# Altium PCB Time4CM4_Riser.PcbDoc (part 1 of 2)
Units mil, origin at the board's own origin, x right, y up, seen from the top; angles counter-clockwise.
Board outline 2171.6 x 1574.73 mil, 2 copper layers (Top Layer, Bottom Layer), stack 61.756 mil thick; 2 components, 138 nets, 412 pads, 162 vias.
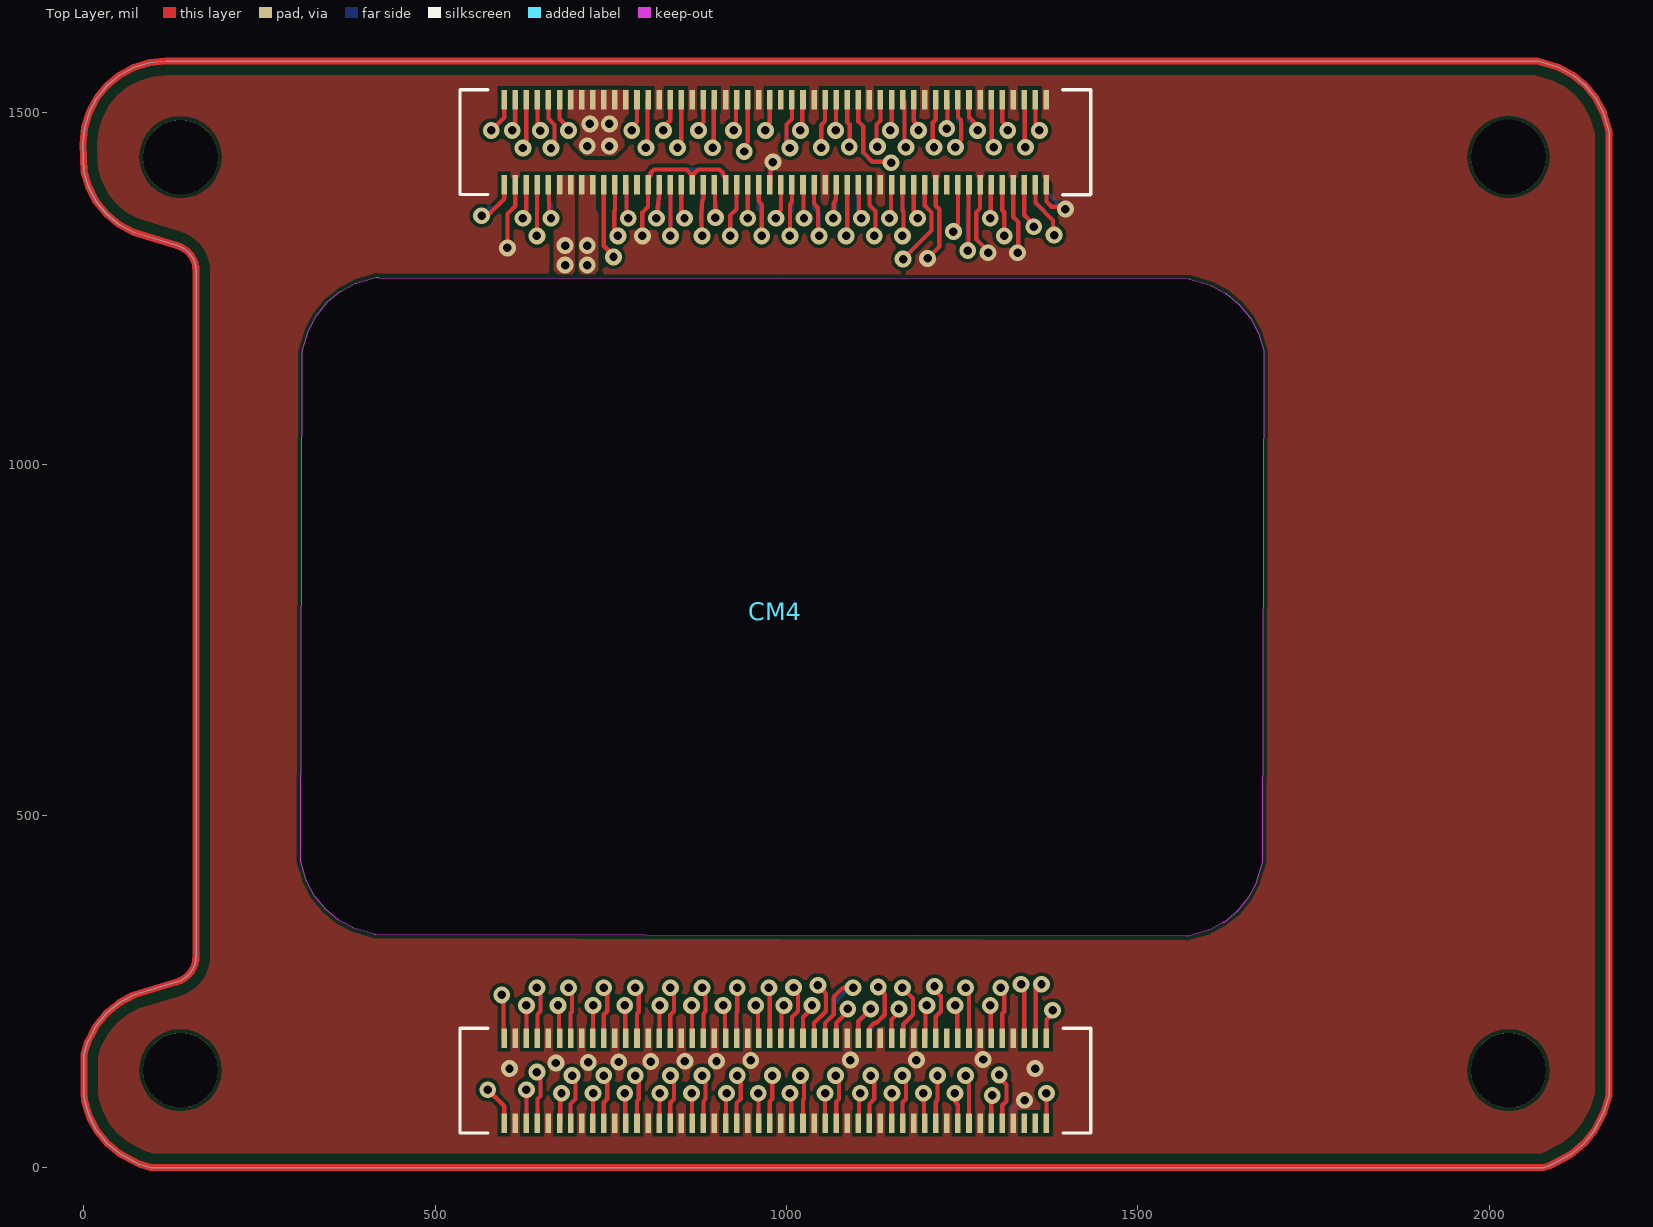
[diagram p0: Top Layer view]
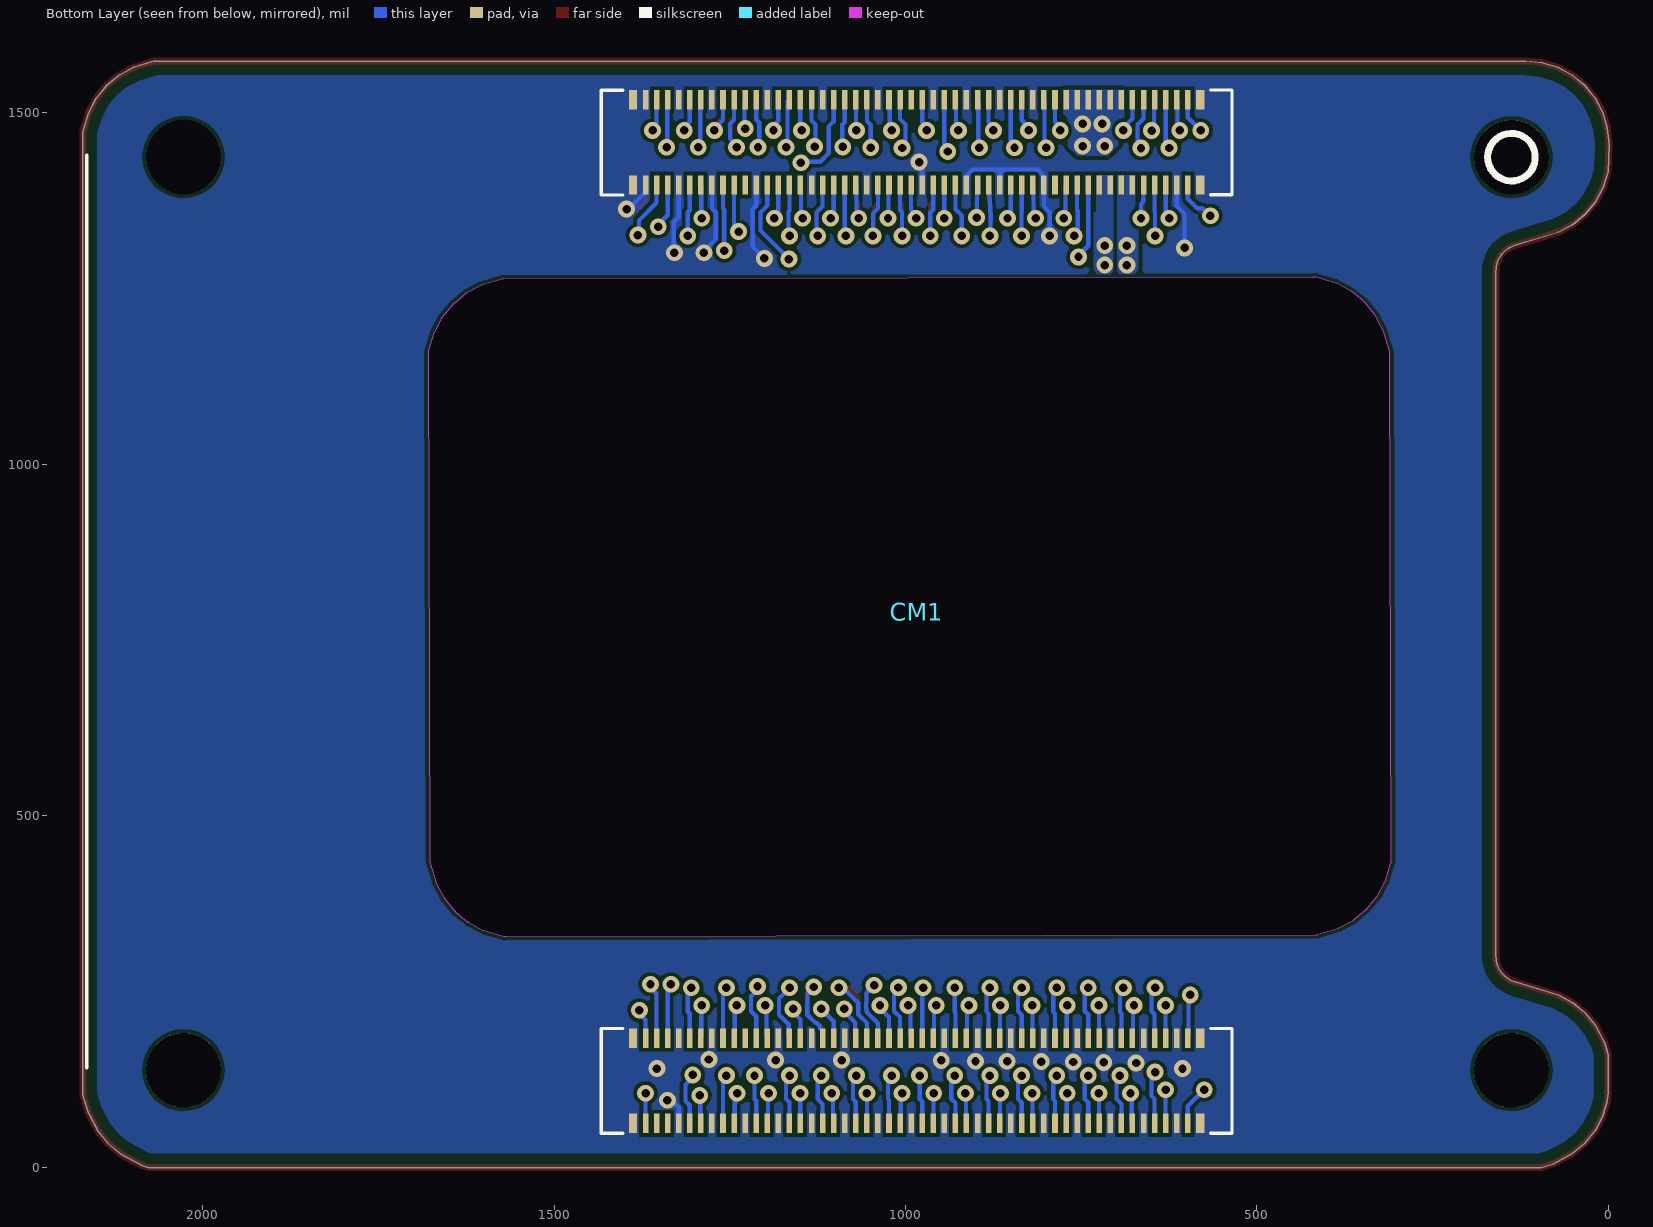
[diagram p1: Bottom Layer view, seen from below]

## Layer stack, top to bottom
Top Solder: solder mask 1, SM-001, Dk 4
Top Layer: signal copper 1.378
Dielectric 1: core 59, Core-043, Dk 4.3
Bottom Layer: signal copper 1.378
Bottom Solder: solder mask 1, SM-001, Dk 4

## Board outline
33.59,33.59 51.49,18.9 79.04,4.18 95.6,-0.85 2077.21,-0.85 2085.95,1.8 2116.43,18.1 2134.33,32.79 2149.02,50.68 2162.48,75.88 ccw(c2153.66,80.59) 2163.23,77.69 2170,100 ccw(c2160.6,103.41) 2170.6,103.41 2170.6,1472.34 ccw(c2160.6,1472.34) 2170.17,1475.24 2162.39,1500.89 2151.47,1521.31 2136.78,1539.21 2118.89,1553.9 2098.47,1564.81 2068.57,1573.88 2068.57,1573.8 117.11,1573.8 94.07,1571.53 71.91,1564.81 51.49,1553.9 33.59,1539.21 18.91,1521.31 7.99,1500.89 1.27,1478.73 -1,1455.69 0.46,1416.15 7.18,1393.99 18.1,1373.57 32.79,1355.67 50.68,1340.98 70.24,1330.53 72.05,1329.78 132.9,1311.32 cw(c121.82,1274.78) 160,1274.78 160,300.02 cw(c121.82,300.02) 132.9,263.48 72.05,245.02 70.24,244.27 50.68,233.82 32.79,219.13 18.1,201.23 6.12,178.83 ccw(c14.94,174.12) 5.37,177.02 0.91,162.29 ccw(c10.46,159.35) 0.46,159.39 0.46,105.92 1.27,94.07 7.99,71.91 18.91,51.49
cut-out: 316.79,408.15 313.2,419.98 cw(c544.4,490.56) 313.2,420 313.2,419.98 cw(c317.13,421.18) 313.19,420.03 cw(c327.37,424.19) 313.18,420.07 309.32,432.79 cw(c317.89,435.39) 309.3,432.85 cw(c309.59,432.94) 309.3,432.86 cw(c309.58,432.95) 309.29,432.87 cw(c317.29,435.39) 309.27,432.96 cw(c329.13,438.88) 309.25,433.02 cw(c323.65,437.25) 308.64,437.25 cw(c311.88,437.26) 308.64,437.27 308.64,437.3 311.01,1159.14 cw(c316.02,1159.12) 311.22,1160.58 320.29,1190.47 cw(c325.08,1189.02) 320.68,1191.39 331.58,1211.79 cw(c335.99,1209.44) 332.13,1212.62 332.14,1212.63 346.81,1230.51 cw(c349.99,1227.92) 346.83,1230.52 cw(c350.68,1227.35) 347.51,1231.21 347.52,1231.22 365.4,1245.89 cw(c366.54,1244.51) 365.42,1245.91 cw(c368.59,1242.02) 366.23,1246.44 386.64,1257.36 cw(c389.02,1252.91) 387.55,1257.73 cw(c387.59,1257.64) 387.57,1257.74 413.2,1265.51 cw(c413.24,1265.43) 413.22,1265.52 413.2,1265.51 cw(c417.57,1251.12) 417.57,1266.16 cw(c417.57,1261.15) 419.62,1265.73 1572.52,1263.79 cw(c1572.51,1258.79) 1573.96,1263.58 1603.86,1254.51 cw(c1602.41,1249.74) 1604.78,1254.13 1625.17,1243.22 cw(c1622.84,1238.83) 1626,1242.67 1626,1242.68 cw(c1625.85,1242.48) 1626.01,1242.67 1643.89,1227.99 cw(c1643.74,1227.79) 1643.91,1227.98 1643.9,1227.98 cw(c1640.75,1224.14) 1644.59,1227.3 cw(c1644.39,1227.12) 1644.6,1227.28 1659.28,1209.4 1659.29,1209.38 ccw(c1659.09,1209.23) 1659.28,1209.4 1659.28,1209.39 cw(c1655.42,1206.22) 1659.83,1208.58 cw(c1659.83,1208.57) 1659.83,1208.57 ccw(c1655.41,1206.21) 1659.29,1209.38 1659.83,1208.58 1659.83,1208.57 1670.74,1188.16 cw(c1670.74,1188.15) 1670.75,1188.15 cw(c1666.35,1185.8) 1671.12,1187.24 1678.9,1161.6 cw(c1664.51,1157.23) 1679.55,1157.23 cw(c1679.45,1157.23) 1679.55,1157.22 1677.18,435.35 ccw(c1676.97,435.36) 1677.18,435.37 1677.18,435.35 cw(c1672.18,435.36) 1676.96,433.91 1667.89,404.02 cw(c1663.13,405.46) 1667.51,403.1 1656.61,382.7 cw(c1652.2,385.04) 1656.06,381.87 1656.06,381.88 cw(c1655.63,382.22) 1656.05,381.86 1641.38,363.98 cw(c1640.94,364.32) 1641.36,363.96 1641.37,363.97 cw(c1637.5,367.15) 1640.68,363.28 1640.67,363.27 ccw(c1640.03,364.06) 1640.68,363.28 1640.67,363.28 ccw(c1637.51,367.14) 1641.36,363.96 1640.67,363.27 1622.78,348.6 cw(c1619.52,352.56) 1622.77,348.58 1622.78,348.59 cw(c1619.6,352.46) 1621.96,348.05 ccw(c1619.61,352.44) 1622.77,348.58 1621.96,348.05 cw(c1621.92,348.11) 1621.95,348.04 1601.54,337.13 1601.53,337.12 ccw(c1601.46,337.28) 1601.54,337.13 cw(c1599.17,341.57) 1600.57,336.73 1571.8,328.43 ccw(c1570.29,333.54) 1571.84,328.44 cw(c1571.04,331.03) 1571.79,328.43 1571.8,328.43 cw(c1569.92,334.78) 1569.92,328.16 cw(c1569.92,333.17) 1569.08,328.23 415.67,330.69 cw(c415.68,335.71) 414.23,330.91 384.33,339.98 cw(c385.78,344.77) 383.41,340.36 363.01,351.26 cw(c365.37,355.69) 362.19,351.82 362.19,351.81 cw(c377.89,370.99) 362.18,351.82 344.3,366.5 344.28,366.51 cw(c347.47,370.38) 343.59,367.2 343.59,367.21 329.56,384.29 329.56,384.3 329.53,384.34 cw(c333.37,387.54) 329.5,384.37 cw(c341.13,393.86) 327.95,386.69 cw(c343.56,395.14) 327.93,386.72 317.89,405.5 cw(c417.02,458.02) 317.88,405.52 cw(c331.16,412.55) 316.79,408.14 cw(c316.87,408.17)
cut-out: 317.44,406.33 cw(c321.9,408.71) 317.07,407.24 ccw(c321.92,408.72)
cut-out: 317.44,406.33 cw(c321.9,408.71) 317.07,407.24 ccw(c321.92,408.72)

## Design rules (kind name [scope] priority, off if disabled: settings)
BoardOutlineClearance BoardOutlineClearance_Polygon [IsPolygon] p1: gap=20 ignorepadtopadclearanceinfootprint=FALSE
Clearance [All] p1: gap=5 ignorepadtopadclearanceinfootprint=FALSE
DiffPairsRouting [All] p1: maxlimit=10 minlimit=10 mostfreqgap=10 toplayer_minwidth=6 toplayer_maxwidth=6 toplayer_prefwidth=6 bottomlayer_minwidth=6 bottomlayer_maxwidth=6 bottomlayer_prefwidth=6 maxuncoupledlength=500
HoleSize [All] p1: absolutevalues=TRUE maxlimit=120 minlimit=6 maxpercent=80.000 minpercent=20.000
PlaneClearance [All] p1: clearance=8
PlaneConnect [All] p1: planeconnectstyle=Direct reliefexpansion=20 reliefentries=4 reliefconductorwidth=10 reliefairgap=10
PolygonConnect [All] p1: connectstyle=Direct reliefconductorwidth=10 reliefentries=4 polygonreliefangle="90 Angle" airgapwidth=10
RoutingVias [All] p1: holewidth=6 width=20 viastyle="Through Hole" minholewidth=6 minwidth=10 maxholewidth=50 maxwidth=100
SolderMaskExpansion [All] p1: expansion=4 istentingtop=FALSE
Width [All] p1: maxlimit=150 minlimit=6 preferedwidth=10
26 further rules are at their usual default settings.

## Classes and differential pairs
net class CM4_IO_Conn_Nets: 1V8 3V3 5V ANAIP_0 ANAIP_1 BT_DIS CM0_C_N CM0_C_P CM0_D0_N CM0_D0_P CM0_D1_N CM0_D1_P CM1_C_N CM1_C_P CM1_D0_N CM1_D0_P CM1_D1_N CM1_D1_P CM1_D2_N CM1_D2_P CM1_D3_N CM1_D3_P CM_GPIOx DSI0_C_N DSI0_C_P DSI0_D0_N DSI0_D0_P DSI0_D1_N DSI0_D1_P DSI1_C_N DSI1_C_P DSI1_D0_N DSI1_D0_P DSI1_D1_N DSI1_D1_P DSI1_D2_N DSI1_D2_P DSI1_D3_N DSI1_D3_P ETH_LED1 ETH_LED2 ETH_LED3 ETH_PAIR0_N ETH_PAIR0_P ETH_PAIR1_N ETH_PAIR1_P ETH_PAIR2_N ETH_PAIR2_P ETH_PAIR3_N ETH_PAIR3_P ETH_SYNC_IN ETH_SYNC_OUT GLOBAL_EN GND GPIO_0 GPIO_1 GPIO_2 GPIO_3 GPIO_4 GPIO_5 GPIO_6 GPIO_7 GPIO_8 GPIO_9 GPIO_10 GPIO_11 GPIO_12 GPIO_13 GPIO_16 GPIO_17 GPIO_19 GPIO_20 GPIO_21 GPIO_22 GPIO_23 GPIO_24 GPIO_25 GPIO_26 GPIO_27 GPIO_44 GPIO_45 GPIO_VREF HDMI0_CEC HDMI0_CLK_N HDMI0_CLK_P HDMI0_HP HDMI0_SCL HDMI0_SDA HDMI0_TX0_N HDMI0_TX0_P HDMI0_TX1_N HDMI0_TX1_P HDMI0_TX2_N HDMI0_TX2_P HDMI1_CEC HDMI1_CLK_N HDMI1_CLK_P HDMI1_HP HDMI1_SCL HDMI1_SDA HDMI1_TX0_N HDMI1_TX0_P HDMI1_TX1_N HDMI1_TX1_P HDMI1_TX2_N HDMI1_TX2_P LED_ACT LED_PWR NetCM1_20 NetCM1_49 NetCM1_51 NetCM1_55 NetCM1_76 NetCM1_104 NetCM1_106 NetCM1_119 nEXTRST nRPIBOOT PCIe_CLK_N PCIe_CLK_nREQ PCIe_CLK_P PCIe_nRST PCIe_RX_N PCIe_RX_P PCIe_TX_N PCIe_TX_P RUN_PG SD_CLK SD_CMD SD_DAT0 SD_DAT1 SD_DAT2 SD_DAT3 SD_DAT4 SD_DAT5 SD_DAT6 SD_DAT7 SD_PWR_ON SD_VDD_OR USB_N USB_OTG USB_P VDAC_COMP WL_DIS
net class CM4_Conn_Nets: 1V8 3V3 5V ANAIP_0 ANAIP_1 BT_DIS CM0_C_N CM0_C_P CM0_D0_N CM0_D0_P CM0_D1_N CM0_D1_P CM1_C_N CM1_C_P CM1_D0_N CM1_D0_P CM1_D1_N CM1_D1_P CM1_D2_N CM1_D2_P CM1_D3_N CM1_D3_P CM_GPIOx DSI0_C_N DSI0_C_P DSI0_D0_N DSI0_D0_P DSI0_D1_N DSI0_D1_P DSI1_C_N DSI1_C_P DSI1_D0_N DSI1_D0_P DSI1_D1_N DSI1_D1_P DSI1_D2_N DSI1_D2_P DSI1_D3_N DSI1_D3_P ETH_LED1 ETH_LED2 ETH_LED3 ETH_PAIR0_N ETH_PAIR0_P ETH_PAIR1_N ETH_PAIR1_P ETH_PAIR2_N ETH_PAIR2_P ETH_PAIR3_N ETH_PAIR3_P ETH_SYNC_IN ETH_SYNC_OUT GLOBAL_EN GND GPIO_0 GPIO_1 GPIO_2 GPIO_3 GPIO_4 GPIO_5 GPIO_6 GPIO_7 GPIO_8 GPIO_9 GPIO_10 GPIO_11 GPIO_12 GPIO_13 GPIO_16 GPIO_17 GPIO_19 GPIO_20 GPIO_21 GPIO_22 GPIO_23 GPIO_24 GPIO_25 GPIO_26 GPIO_27 GPIO_44 GPIO_45 GPIO_VREF HDMI0_CEC HDMI0_CLK_N HDMI0_CLK_P HDMI0_HP HDMI0_SCL HDMI0_SDA HDMI0_TX0_N HDMI0_TX0_P HDMI0_TX1_N HDMI0_TX1_P HDMI0_TX2_N HDMI0_TX2_P HDMI1_CEC HDMI1_CLK_N HDMI1_CLK_P HDMI1_HP HDMI1_SCL HDMI1_SDA HDMI1_TX0_N HDMI1_TX0_P HDMI1_TX1_N HDMI1_TX1_P HDMI1_TX2_N HDMI1_TX2_P LED_ACT LED_PWR NetCM1_51 NetCM1_55 NetCM4_20 NetCM4_49 NetCM4_76 NetCM4_104 NetCM4_106 NetCM4_119 nEXTRST nRPIBOOT PCIe_CLK_N PCIe_CLK_nREQ PCIe_CLK_P PCIe_nRST PCIe_RX_N PCIe_RX_P PCIe_TX_N PCIe_TX_P RUN_PG SD_CLK SD_CMD SD_DAT0 SD_DAT1 SD_DAT2 SD_DAT3 SD_DAT4 SD_DAT5 SD_DAT6 SD_DAT7 SD_PWR_ON SD_VDD_OR USB_N USB_OTG USB_P VDAC_COMP WL_DIS
component class CM4_IO_Conn: CM1
component class CM4_Conn: CM4

## Components (designator, comment, footprint, x,y, rotation, side; value= is the part's Value field where it differs from the comment)
CM1 "Raspberry Pi Compute Module 4" CM4-F40C-100DS-0.4v_1.5mm_0mm#1 1082.68,790.35 r90 bottom locked
CM4 "Raspberry Pi Compute Module 4" CM4-F40C-100DS-0.4v_1.5mm_0mm#2 1082.68,790.55 r90 top locked

## Footprints (in the part's own frame and the unit in brackets; to place one, negate y for a bottom-side part, rotate by r counter-clockwise, add the part's x,y. Pads: shape width x height; smd on the part's side, far side on the other; paste and mask are expansions set on the pad)
CM4-F40C-100DS-0.4v_1.5mm_0mm#1 [mm] "DF40C-100DS-0.4v by Amornthep Phunsin"
  rect 0.7x0.2 smd: 1(18.5,7.3) 2(15.42,7.3) 3(18.5,6.9) 4(15.42,6.9) 5(18.5,6.5) 6(15.42,6.5) 7(18.5,6.1) 8(15.42,6.1) 9(18.5,5.7) 10(15.42,5.7) 11(18.5,5.3) 12(15.42,5.3) 13(18.5,4.9) 14(15.42,4.9) 15(18.5,4.5) 16(15.42,4.5) 17(18.5,4.1) 18(15.42,4.1) 19(18.5,3.7) 20(15.42,3.7) 21(18.5,3.3) 22(15.42,3.3) 23(18.5,2.9) 24(15.42,2.9) 25(18.5,2.5) 26(15.42,2.5) 27(18.5,2.1) 28(15.42,2.1) 29(18.5,1.7) 30(15.42,1.7) 31(18.5,1.3) 32(15.42,1.3) 33(18.5,0.9) 34(15.42,0.9) 35(18.5,0.5) 36(15.42,0.5) 37(18.5,0.1) 38(15.42,0.1) 39(18.5,-0.3) 40(15.42,-0.3) 41(18.5,-0.7) 42(15.42,-0.7) 43(18.5,-1.1) 44(15.42,-1.1) 45(18.5,-1.5) 46(15.42,-1.5) 47(18.5,-1.9) 48(15.42,-1.9) 49(18.5,-2.3) 50(15.42,-2.3) 51(18.5,-2.7) 52(15.42,-2.7) 53(18.5,-3.1) 54(15.42,-3.1) 55(18.5,-3.5) 56(15.42,-3.5) 57(18.5,-3.9) 58(15.42,-3.9) 59(18.5,-4.3) 60(15.42,-4.3) 61(18.5,-4.7) 62(15.42,-4.7) 63(18.5,-5.1) 64(15.42,-5.1) 65(18.5,-5.5) 66(15.42,-5.5) 67(18.5,-5.9) 68(15.42,-5.9) 69(18.5,-6.3) 70(15.42,-6.3) 71(18.5,-6.7) 72(15.42,-6.7) 73(18.5,-7.1) 74(15.42,-7.1) 75(18.5,-7.5) 76(15.42,-7.5) 77(18.5,-7.9) 78(15.42,-7.9) 79(18.5,-8.3) 80(15.42,-8.3) 81(18.5,-8.7) 82(15.42,-8.7) 83(18.5,-9.1) 84(15.42,-9.1) 85(18.5,-9.5) 86(15.42,-9.5) 87(18.5,-9.9) 88(15.42,-9.9) 89(18.5,-10.3) 90(15.42,-10.3) 91(18.5,-10.7) 92(15.42,-10.7) 93(18.5,-11.1) 94(15.42,-11.1) 95(18.5,-11.5) 96(15.42,-11.5) 97(18.5,-11.9) 98(15.42,-11.9) 99(18.5,-12.3) 100(15.42,-12.3) 101(-15.42,7.3) 102(-18.5,7.3) 103(-15.42,6.9) 104(-18.5,6.9) 105(-15.42,6.5) 106(-18.5,6.5) 107(-15.42,6.1) 108(-18.5,6.1) 109(-15.42,5.7) 110(-18.5,5.7) 111(-15.42,5.3) 112(-18.5,5.3) 113(-15.42,4.9) 114(-18.5,4.9) 115(-15.42,4.5) 116(-18.5,4.5) 117(-15.42,4.1) 118(-18.5,4.1) 119(-15.42,3.7) 120(-18.5,3.7) 121(-15.42,3.3) 122(-18.5,3.3) 123(-15.42,2.9) 124(-18.5,2.9) 125(-15.42,2.5) 126(-18.5,2.5) 127(-15.42,2.1) 128(-18.5,2.1) 129(-15.42,1.7) 130(-18.5,1.7) 131(-15.42,1.3) 132(-18.5,1.3) 133(-15.42,0.9) 134(-18.5,0.9) 135(-15.42,0.5) 136(-18.5,0.5) 137(-15.42,0.1) 138(-18.5,0.1) 139(-15.42,-0.3) 140(-18.5,-0.3) 141(-15.42,-0.7) 142(-18.5,-0.7) 143(-15.42,-1.1) 144(-18.5,-1.1) 145(-15.42,-1.5) 146(-18.5,-1.5) 147(-15.42,-1.9) 148(-18.5,-1.9) 149(-15.42,-2.3) 150(-18.5,-2.3) 151(-15.42,-2.7) 152(-18.5,-2.7) 153(-15.42,-3.1) 154(-18.5,-3.1) 155(-15.42,-3.5) 156(-18.5,-3.5) 157(-15.42,-3.9) 158(-18.5,-3.9) 159(-15.42,-4.3) 160(-18.5,-4.3) 161(-15.42,-4.7) 162(-18.5,-4.7) 163(-15.42,-5.1) 164(-18.5,-5.1) 165(-15.42,-5.5) 166(-18.5,-5.5) 167(-15.42,-5.9) 168(-18.5,-5.9) 169(-15.42,-6.3) 170(-18.5,-6.3) 171(-15.42,-6.7) 172(-18.5,-6.7) 173(-15.42,-7.1) 174(-18.5,-7.1) 175(-15.42,-7.5) 176(-18.5,-7.5) 177(-15.42,-7.9) 178(-18.5,-7.9) 179(-15.42,-8.3) 180(-18.5,-8.3) 181(-15.42,-8.7) 182(-18.5,-8.7) 183(-15.42,-9.1) 184(-18.5,-9.1) 185(-15.42,-9.5) 186(-18.5,-9.5) 187(-15.42,-9.9) 188(-18.5,-9.9) 189(-15.42,-10.3) 190(-18.5,-10.3) 191(-15.42,-10.7) 192(-18.5,-10.7) 193(-15.42,-11.1) 194(-18.5,-11.1) 195(-15.42,-11.5) 196(-18.5,-11.5) 197(-15.42,-11.9) 198(-18.5,-11.9) 199(-15.42,-12.3) 200(-18.5,-12.3)
  silkscreen extent -18.85,-24.86 18.85,27.5
CM4-F40C-100DS-0.4v_1.5mm_0mm#2 [mm] "DF40C-100DS-0.4v by Amornthep Phunsin"
  rect 0.7x0.2 smd: 1(18.5,-7.3) 2(15.42,-7.3) 3(18.5,-6.9) 4(15.42,-6.9) 5(18.5,-6.5) 6(15.42,-6.5) 7(18.5,-6.1) 8(15.42,-6.1) 9(18.5,-5.7) 10(15.42,-5.7) 11(18.5,-5.3) 12(15.42,-5.3) 13(18.5,-4.9) 14(15.42,-4.9) 15(18.5,-4.5) 16(15.42,-4.5) 17(18.5,-4.1) 18(15.42,-4.1) 19(18.5,-3.7) 20(15.42,-3.7) 21(18.5,-3.3) 22(15.42,-3.3) 23(18.5,-2.9) 24(15.42,-2.9) 25(18.5,-2.5) 26(15.42,-2.5) 27(18.5,-2.1) 28(15.42,-2.1) 29(18.5,-1.7) 30(15.42,-1.7) 31(18.5,-1.3) 32(15.42,-1.3) 33(18.5,-0.9) 34(15.42,-0.9) 35(18.5,-0.5) 36(15.42,-0.5) 37(18.5,-0.1) 38(15.42,-0.1) 39(18.5,0.3) 40(15.42,0.3) 41(18.5,0.7) 42(15.42,0.7) 43(18.5,1.1) 44(15.42,1.1) 45(18.5,1.5) 46(15.42,1.5) 47(18.5,1.9) 48(15.42,1.9) 49(18.5,2.3) 50(15.42,2.3) 51(18.5,2.7) 52(15.42,2.7) 53(18.5,3.1) 54(15.42,3.1) 55(18.5,3.5) 56(15.42,3.5) 57(18.5,3.9) 58(15.42,3.9) 59(18.5,4.3) 60(15.42,4.3) 61(18.5,4.7) 62(15.42,4.7) 63(18.5,5.1) 64(15.42,5.1) 65(18.5,5.5) 66(15.42,5.5) 67(18.5,5.9) 68(15.42,5.9) 69(18.5,6.3) 70(15.42,6.3) 71(18.5,6.7) 72(15.42,6.7) 73(18.5,7.1) 74(15.42,7.1) 75(18.5,7.5) 76(15.42,7.5) 77(18.5,7.9) 78(15.42,7.9) 79(18.5,8.3) 80(15.42,8.3) 81(18.5,8.7) 82(15.42,8.7) 83(18.5,9.1) 84(15.42,9.1) 85(18.5,9.5) 86(15.42,9.5) 87(18.5,9.9) 88(15.42,9.9) 89(18.5,10.3) 90(15.42,10.3) 91(18.5,10.7) 92(15.42,10.7) 93(18.5,11.1) 94(15.42,11.1) 95(18.5,11.5) 96(15.42,11.5) 97(18.5,11.9) 98(15.42,11.9) 99(18.5,12.3) 100(15.42,12.3) 101(-15.42,-7.3) 102(-18.5,-7.3) 103(-15.42,-6.9) 104(-18.5,-6.9) 105(-15.42,-6.5) 106(-18.5,-6.5) 107(-15.42,-6.1) 108(-18.5,-6.1) 109(-15.42,-5.7) 110(-18.5,-5.7) 111(-15.42,-5.3) 112(-18.5,-5.3) 113(-15.42,-4.9) 114(-18.5,-4.9) 115(-15.42,-4.5) 116(-18.5,-4.5) 117(-15.42,-4.1) 118(-18.5,-4.1) 119(-15.42,-3.7) 120(-18.5,-3.7) 121(-15.42,-3.3) 122(-18.5,-3.3) 123(-15.42,-2.9) 124(-18.5,-2.9) 125(-15.42,-2.5) 126(-18.5,-2.5) 127(-15.42,-2.1) 128(-18.5,-2.1) 129(-15.42,-1.7) 130(-18.5,-1.7) 131(-15.42,-1.3) 132(-18.5,-1.3) 133(-15.42,-0.9) 134(-18.5,-0.9) 135(-15.42,-0.5) 136(-18.5,-0.5) 137(-15.42,-0.1) 138(-18.5,-0.1) 139(-15.42,0.3) 140(-18.5,0.3) 141(-15.42,0.7) 142(-18.5,0.7) 143(-15.42,1.1) 144(-18.5,1.1) 145(-15.42,1.5) 146(-18.5,1.5) 147(-15.42,1.9) 148(-18.5,1.9) 149(-15.42,2.3) 150(-18.5,2.3) 151(-15.42,2.7) 152(-18.5,2.7) 153(-15.42,3.1) 154(-18.5,3.1) 155(-15.42,3.5) 156(-18.5,3.5) 157(-15.42,3.9) 158(-18.5,3.9) 159(-15.42,4.3) 160(-18.5,4.3) 161(-15.42,4.7) 162(-18.5,4.7) 163(-15.42,5.1) 164(-18.5,5.1) 165(-15.42,5.5) 166(-18.5,5.5) 167(-15.42,5.9) 168(-18.5,5.9) 169(-15.42,6.3) 170(-18.5,6.3) 171(-15.42,6.7) 172(-18.5,6.7) 173(-15.42,7.1) 174(-18.5,7.1) 175(-15.42,7.5) 176(-18.5,7.5) 177(-15.42,7.9) 178(-18.5,7.9) 179(-15.42,8.3) 180(-18.5,8.3) 181(-15.42,8.7) 182(-18.5,8.7) 183(-15.42,9.1) 184(-18.5,9.1) 185(-15.42,9.5) 186(-18.5,9.5) 187(-15.42,9.9) 188(-18.5,9.9) 189(-15.42,10.3) 190(-18.5,10.3) 191(-15.42,10.7) 192(-18.5,10.7) 193(-15.42,11.1) 194(-18.5,11.1) 195(-15.42,11.5) 196(-18.5,11.5) 197(-15.42,11.9) 198(-18.5,11.9) 199(-15.42,12.3) 200(-18.5,12.3)
  silkscreen extent -18.85,-8.9 18.85,13.9, body extent -18.67,-8.8 18.66,13.8, height 2.87

## Part data
CM1 CM4: library part CM4, "Raspberry Pi Compute Module 4 by Amornthep Phunsin"

## Free pads (board coordinates)
  round 106.3 hole 106.3: 1(137.8,137.79) 1(137.8,1437.01) 1(2027.56,137.79) 1(2027.56,1437.15)
  rect 11.81x27.56 smd far side: 2(580.5,62.01) 2(580.5,183.27) 2(580.5,1397.44) 2(580.5,1518.7) 2(1388,62) 2(1388,183.27) 2(1388,1397.44) 2(1388,1518.7)

## Via types
v1: diameter 24, hole 12, Top Layer to Bottom Layer, tented both sides, 162 vias

## Nets (pads, with @x,y where several pads share a name; then routed paths per layer and width w, separated by ;. In a path a pad name is that pad's centre, name@x,y a point inside that pad or via, vN(x,y) a via of type N, cw(c..) or ccw(c..) an arc to the next point about the centre after c; other vN are vias at no path point)
1V8: CM1.88 CM1.90 CM4.88 CM4.90
  other v1: 685.04,1283.46 685.04,1311.02
3V3: CM1.84 CM1.86 CM4.84 CM4.86
  other v1: 716.54,1283.46 716.54,1311.02
5V: CM1.77 CM1.79 CM1.81 CM1.83 CM1.85 CM1.87 CM4.77 CM4.79 CM4.81 CM4.83 CM4.85 CM4.87
  other v1: 716.54,1452.76 748.03,1452.76 720.47,1484.25 748.03,1484.25
ANAIP_0: CM1.96 CM4.96 | length 87.3
  Top Layer w6: v1@629.92,1359.79 CM4.96@629.92,1397.64
  Bottom Layer w6: v1(625,1350) 625,1354.87 629.92,1359.79 CM1.96@629.92,1397.44
ANAIP_1: CM1.94 CM4.94 | length 145.6
  Top Layer w6: v1(645,1325) 645,1396.97 CM4.94@645.67,1397.64
  Bottom Layer w6: v1(645,1325) 645,1359.65 645.67,1360.32 CM1.94@645.67,1397.44
BT_DIS: CM1.91 CM4.91 | length 137.1
  Top Layer w6: CM4.91@661.42,1518.9 661.42,1491.58 670,1483 670,1459.75 665.05,1454.79 v1(665.05,1449.92)
  Bottom Layer w6: CM1.91@661.42,1518.7 661.42,1491.58 670,1483 v1@670,1459.74
CM0_C_N: CM1.140 CM4.140 | length 131.4
  Top Layer w6: CM4.140@1070.87,62.2 1070.87,92.58 1075,96.72 v1@1075,120.13
  Bottom Layer w6: v1(1070,130) 1070,125.13 1075,120.13 1075,96.72 1070.87,92.58 CM1.140@1070.87,62.01
CM0_C_P: CM1.142 CM4.142 | length 85.9
  Top Layer w6: v1(1055,105) 1055.06,104.94 1055.06,62.26 CM4.142@1055.12,62.2
  Bottom Layer w6: v1(1055,105) 1055.06,104.94 1055.06,62.07 CM1.142@1055.12,62.01
CM0_D0_N: CM1.128 CM4.128 | length 131.8
  Top Layer w6: CM4.128@1165.35,62.2 1165.35,92.07 1170,96.72 v1@1170,120.13
  Bottom Layer w6: v1(1165,130) 1165,125.13 1170,120.13 1170,96.72 1165.35,92.07 CM1.128@1165.35,62.01
CM0_D0_P: CM1.130 CM4.130 | length 86.1
  Top Layer w6: CM4.130@1149.61,62.2 1149.8,62.4 1149.8,104.8 v1(1150,105)
  Bottom Layer w6: CM1.130@1149.61,62.01 1149.8,62.21 1149.8,104.8 v1(1150,105)
CM0_D1_N: CM1.134 CM4.134 | length 133.7
  Top Layer w6: CM4.134@1118.11,62.2 1118.11,89.83 1125,96.72 v1@1125,120.13
  Bottom Layer w6: CM1.134@1118.11,62.01 1118.11,89.83 1125,96.72 1125,120.13 1120,125.13 v1(1120,130)
CM0_D1_P: CM1.136 CM4.136 | length 88
  Top Layer w6: CM4.136@1102.36,62.2 1103.3,63.14 1103.3,103.3 v1(1105,105)
  Bottom Layer w6: CM1.136@1102.36,62.01 1103.3,62.95 1103.3,103.3 v1(1105,105)
CM1_C_N: CM1.127 CM4.127 | length 167.8
  Top Layer w6: v1(1165,255) 1180,240 1180,216.72 1166.29,203.01 1166.29,184.4 CM4.127@1165.35,183.46
  Bottom Layer w6: v1(1165,255) 1180,240 1180,216.72 1166.29,203.01 1166.29,184.21 CM1.127@1165.35,183.27
CM1_C_P: CM1.129 CM4.129 | length 91.9
  Top Layer w6: CM4.129@1149.61,183.46 1149.61,209.74 1160,220.13 v1(1160,225)
  Bottom Layer w6: CM1.129@1149.61,183.27 1149.61,209.74 1160,220.13 v1(1160,225)
CM1_D0_N: CM1.115 CM4.115 | length 135.6
  Top Layer w6: CM4.115@1259.84,183.46 1259.84,219.61 1260,219.77 v1@1260,245.13
  Bottom Layer w6: v1(1255,255) 1255,250.13 1260,245.13 1260,219.67 1259.84,219.51 CM1.115@1259.84,183.27
CM1_D0_P: CM1.117 CM4.117 | length 96.7
  Top Layer w6: v1(1240,230) 1243.16,226.84 1243.16,184.4 CM4.117@1244.09,183.46
  Bottom Layer w6: v1(1240,230) 1243.16,226.84 1243.16,184.21 CM1.117@1244.09,183.27
CM1_D1_N: CM1.121 CM4.121 | length 160.9
  Top Layer w6: v1(1210.77,256.93) 1210.77,252.06 1220,242.83 1220,221.72 1212.6,214.31 CM4.121@1212.6,183.46
  Bottom Layer w6: v1(1210.77,256.93) 1210.77,252.06 1220,242.83 1220,221.72 1212.6,214.31 CM1.121@1212.6,183.27
CM1_D1_P: CM1.123 CM4.123 | length 95.9
  Top Layer w6: CM4.123@1196.85,183.46 1197.79,184.4 1197.79,227.79 v1(1200,230)
  Bottom Layer w6: CM1.123@1196.85,183.27 1197.79,184.21 1197.79,227.79 v1(1200,230)
CM1_D2_N: CM1.133 CM4.133 | length 177.1
  Top Layer w6: CM4.133@1118.11,183.46 CM4.133@1118.11,195.84 ; 1126.14,205.09 ccw(c1127.52,199.24) 1123.29,203.51 1119.85,200.06 ; 1127.5,205.4 ccw(c1126.12,211.24) 1129.74,206.46 1140,216.71 1140,244.27 ccw(c1134,244.27) 1138.27,248.49 v1(1130.66,256.1) ; CM4.133@1118.11,195.84 cw(c1124.11,195.84) 1119.85,200.06 ; CM4.133@1118.11,195.84 cw(c1124.11,195.84) 1119.85,200.06
  Bottom Layer w6: CM1.133@1118.11,183.27 1119.05,184.21 1119.05,194.05 1121.92,196.92 1121.92,200.36 1126.56,205 1126.61,205.05 1128.33,205.05 1140,216.72 1140,232.92 1139.84,234.08 ; v1(1130.66,256.1) 1138.04,248.72 cw(c1133.78,244.5) 1139.78,244.5 1139.78,234.86 ; 1139.78,234.86 ccw(c1145.78,234.9) 1139.84,234.08 ; 1139.78,234.86 ccw(c1145.78,234.9) 1139.84,234.08
CM1_D2_P: CM1.135 CM4.135 | length 97.9
  Top Layer w6: CM4.135@1102.36,183.46 1102.36,207.36 v1(1120,225)
  Bottom Layer w6: CM1.135@1102.36,183.27 1102.36,207.36 v1(1120,225)
CM1_D3_N: CM1.139 CM4.139 | length 96.9
  Top Layer w6: CM4.139@1070.87,183.46 1070.87,205.09 1087.38,221.6 v1(1087.38,225)
  Bottom Layer w6: CM1.139@1070.87,183.27 1071.8,184.21 1071.8,206.03 1087.38,221.6 v1(1087.38,225)
CM1_D3_P: CM1.141 CM4.141 | length 192.7
  Top Layer w6: CM4.141@1055.12,183.46 1055.12,204.9 1067.38,217.16 1067.38,239.93 ; v1(1095,255) 1082.49,255 ccw(c1082.49,249) 1078.26,253.26 1069.1,244.1 ; 1067.38,239.93 cw(c1073.38,239.89) 1069.1,244.1 ; 1067.38,239.93 cw(c1073.38,239.89) 1069.1,244.1
  Bottom Layer w6: CM1.141@1055.12,183.27 1055.12,204.9 1067.38,217.16 1067.38,233.28 1085.65,251.56 1091.56,251.56 v1(1095,255)
CM_GPIOx: CM1.97 CM4.97 | length 91.1
  Top Layer w6: v1(609.92,1475) 609.92,1479.87 614.17,1484.12 CM4.97@614.17,1518.9
  Bottom Layer w6: v1(609.92,1475) 613.24,1478.32 613.24,1517.76 CM1.97@614.17,1518.7
DSI0_C_N: CM1.169 CM4.169 | length 139.9
  Top Layer w6: CM4.169@834.65,183.46 834.65,216.36 840,221.72 v1@840,245.13
  Bottom Layer w6: CM1.169@834.65,183.27 834.65,216.36 840,221.72 840,245.13 835,250.13 v1(835,255)
DSI0_C_P: CM1.171 CM4.171 | length 94.2
  Top Layer w6: CM4.171@818.9,183.46 819.45,184.02 819.45,229.45 v1(820,230)
  Bottom Layer w6: CM1.171@818.9,183.27 819.45,183.82 819.45,229.45 v1(820,230)
DSI0_D0_N: CM1.157 CM4.157 | length 144
  Top Layer w6: CM4.157@929.13,183.46 929.13,220.03 930,220.9 v1(930,255)
  Bottom Layer w6: CM1.157@929.13,183.27 929.13,219.93 930,220.8 v1(930,255)
DSI0_D0_P: CM1.159 CM4.159 | length 96.1
  Top Layer w6: v1(910,230) 912.45,227.55 912.45,184.4 CM4.159@913.39,183.46
  Bottom Layer w6: v1(910,230) 912.45,227.55 912.45,184.21 CM1.159@913.39,183.27
DSI0_D1_N: CM1.163 CM4.163 | length 138
  Top Layer w6: CM4.163@881.89,183.46 881.89,218.13 885,221.24 v1@885,245.13
  Bottom Layer w6: v1(880,255) 880,250.13 885,245.13 885,221.14 881.89,218.03 CM1.163@881.89,183.27
DSI0_D1_P: CM1.165 CM4.165 | length 94.2
  Top Layer w6: v1(865,230) 865.57,229.43 865.57,184.04 CM4.165@866.14,183.46
  Bottom Layer w6: v1(865,230) 865.57,229.43 865.57,183.84 CM1.165@866.14,183.27
DSI1_C_N: CM1.187 CM4.187 | length 137.2
  Top Layer w6: CM4.187@692.91,183.46 692.91,218.64 695,220.73 v1@695,245.13
  Bottom Layer w6: v1(690,255) 690,250.13 695,245.13 695,220.63 692.91,218.55 CM1.187@692.91,183.27
DSI1_C_P: CM1.189 CM4.189 | length 95.1
  Top Layer w6: v1(675,230) 676.23,228.77 676.23,184.4 CM4.189@677.17,183.46
  Bottom Layer w6: v1(675,230) 676.23,228.77 676.23,184.21 CM1.189@677.17,183.27
DSI1_D0_N: CM1.175 CM4.175 | length 137.6
  Top Layer w6: CM4.175@787.4,183.46 787.4,218.39 790,220.99 v1@790,245.13
  Bottom Layer w6: v1(785,255) 785,250.13 790,245.13 790,220.89 787.4,218.29 CM1.175@787.4,183.27
DSI1_D0_P: CM1.177 CM4.177 | length 94.6
  Top Layer w6: v1(770,230) 770.83,229.17 770.83,184.29 CM4.177@771.65,183.46
  Bottom Layer w6: v1(770,230) 770.83,229.17 770.83,184.1 CM1.177@771.65,183.27
DSI1_D1_N: CM1.181 CM4.181 | length 139.5
  Top Layer w6: CM4.181@740.16,183.46 740.16,216.87 745,221.72 v1@745,245.13
  Bottom Layer w6: v1(740,255) 740,250.13 745,245.13 745,221.72 740.16,216.87 CM1.181@740.16,183.27
DSI1_D1_P: CM1.183 CM4.183 | length 93.8
  Top Layer w6: CM4.183@724.41,183.46 724.7,183.76 724.7,229.71 v1(725,230)
  Bottom Layer w6: CM1.183@724.41,183.27 724.7,183.56 724.7,229.71 v1(725,230)
DSI1_D2_N: CM1.193 CM4.193 | length 139.1
  Top Layer w6: CM4.193@645.67,183.46 645.67,217.39 650,221.72 v1@650,245.13
  Bottom Layer w6: v1(645,255) 645,250.13 650,245.13 650,221.72 645.67,217.39 CM1.193@645.67,183.27
DSI1_D2_P: CM1.195 CM4.195 | length 93.3
  Top Layer w6: CM4.195@629.92,183.46 CM4.195@629.92,183.46 v1(630,230) v1(630,230)
  Bottom Layer w6: CM1.195@629.92,183.27 CM1.195@629.92,183.27 v1(630,230) v1(630,230)
DSI1_D3_N: CM1.194 CM4.194 | length 141.6
  Top Layer w6: CM4.194@645.67,62.2 645.67,96.89 650,101.22 v1@650,125.13
  Bottom Layer w6: v1(645,135) 645,130.13 650,125.13 650,101.12 645.67,96.79 CM1.194@645.67,62.01
DSI1_D3_P: CM1.196 CM4.196 | length 95.9
  Top Layer w6: CM4.196@629.92,62.2 629.96,62.24 v1(630,110) v1(630,110)
  Bottom Layer w6: CM1.196@629.92,62.01 629.96,62.05 v1(630,110) v1(630,110)
ETH_LED1: CM1.19 CM4.19 | length 83.7
  Top Layer w6: v1(1228.25,1477.67) 1229.17,1478.59 1229.17,1518.07 CM4.19@1228.35,1518.9
  Bottom Layer w6: v1(1228.25,1477.67) 1229.17,1478.59 1229.17,1517.87 CM1.19@1228.35,1518.7
ETH_LED2: CM1.17 CM4.17 | length 146.9
  Top Layer w6: v1(1240.46,1451) 1240.46,1453.74 1248.25,1461.53 1248.25,1489.9 1244.09,1494.06 CM4.17@1244.09,1518.9
  Bottom Layer w6: v1(1240.46,1451) 1240.46,1453.74 1250,1463.28 1250,1484.2 1244.09,1490.11 CM1.17@1244.09,1518.7
ETH_LED3: CM1.15 CM4.15 | length 97.7
  Top Layer w6: CM4.15@1259.84,1518.9 1259.84,1493.87 1272,1481.71 v1(1272,1475)
  Bottom Layer w6: CM1.15@1259.84,1518.7 1259.84,1490.03 1272,1477.87 v1(1272,1475)
ETH_PAIR0_N: CM1.10 CM4.10 | length 147.5
  Top Layer w6: CM4.10@1307.09,1397.64 1307.09,1361.54 1310,1358.63 v1(1310,1325)
  Bottom Layer w6: CM1.10@1307.09,1397.44 1307.09,1361.45 1310,1358.53 v1(1310,1325)
ETH_PAIR0_P: CM1.12 CM4.12 | length 96.2
  Top Layer w6: v1(1290,1350) 1290.67,1350.67 1290.67,1396.97 CM4.12@1291.34,1397.64
  Bottom Layer w6: v1(1290,1350) 1290.67,1350.67 1290.67,1396.77 CM1.12@1291.34,1397.44
ETH_PAIR1_N: CM1.6 CM4.6 | length 130.2
  Top Layer w6: CM4.6@1338.58,1397.64 1338.58,1354.28 1352,1340.86 v1(1352,1338)
  Bottom Layer w6: CM1.6@1338.58,1397.44 1338.58,1354.28 1352,1340.86 v1(1352,1338)
ETH_PAIR1_P: CM1.4 CM4.4 | length 165.2
  Top Layer w6: CM4.4@1354.33,1397.64 1354.33,1372.2 1379.53,1347 1379.53,1327.47 v1(1381,1326)
  Bottom Layer w6: CM1.4@1354.33,1397.44 1354.33,1372.1 1379.43,1347 1379.43,1327.57 v1(1381,1326)
ETH_PAIR2_N: CM1.9 CM4.9 | length 94.2
  Top Layer w6: CM4.9@1307.09,1518.9 1307.09,1487.79 1315,1479.87 v1(1315,1475)
  Bottom Layer w6: CM1.9@1307.09,1518.7 1307.09,1487.79 1315,1479.87 v1(1315,1475)
ETH_PAIR2_P: CM1.11 CM4.11 | length 138.6
  Top Layer w6: CM4.11@1291.34,1518.9 1292.27,1517.96 1292.27,1453.73 v1(1295,1451)
  Bottom Layer w6: CM1.11@1291.34,1518.7 1292.27,1517.76 1292.27,1453.73 v1(1295,1451)
ETH_PAIR3_N: CM1.5 CM4.5 | length 136.8
  Top Layer w6: CM4.5@1338.58,1518.9 1339.29,1518.19 1339.29,1451.71 v1(1340,1451)
  Bottom Layer w6: CM1.5@1338.58,1518.7 1339.29,1517.99 1339.29,1451.71 v1(1340,1451)
ETH_PAIR3_P: CM1.3 CM4.3 | length 79.4
  Top Layer w6: v1@1354.33,1485.54 CM4.3@1354.33,1518.9
  Bottom Layer w6: CM1.3@1354.33,1518.7 1354.33,1485.54 1360,1479.87 v1(1360,1475)
ETH_SYNC_IN: CM1.16 CM4.16 | length 188.7
  Top Layer w6: v1(1258,1304) 1258.92,1304.92 1258.92,1396.72 CM4.16@1259.84,1397.64
  Bottom Layer w6: v1(1258,1304) 1258,1361.84 1259.92,1363.76 1259.92,1397.36 CM1.16@1259.84,1397.44
ETH_SYNC_OUT: CM1.18 CM4.18 | length 125
  Top Layer w6: v1@1237.61,1335.33 1237.61,1335.87 1244.09,1342.35 CM4.18@1244.09,1397.64
  Bottom Layer w6: v1@1244.09,1337.48 CM1.18@1244.09,1397.44
  other v1: 1237.61,1331
GLOBAL_EN: CM1.99 CM4.99 | length 102.9
  Top Layer w6: v1(580,1475) 598.43,1493.43 CM4.99@598.43,1518.9
  Bottom Layer w6: v1(580,1475) 598.43,1493.43 CM1.99@598.43,1518.7